# Altium PCB V1.PcbDoc
Units mil, origin at the board's own origin, x right, y up, seen from the top; angles counter-clockwise.
Board outline 6000 x 4000 mil, 2 copper layers (Top Layer, Bottom Layer); 35 components, 13 nets, 112 pads, 15 vias.
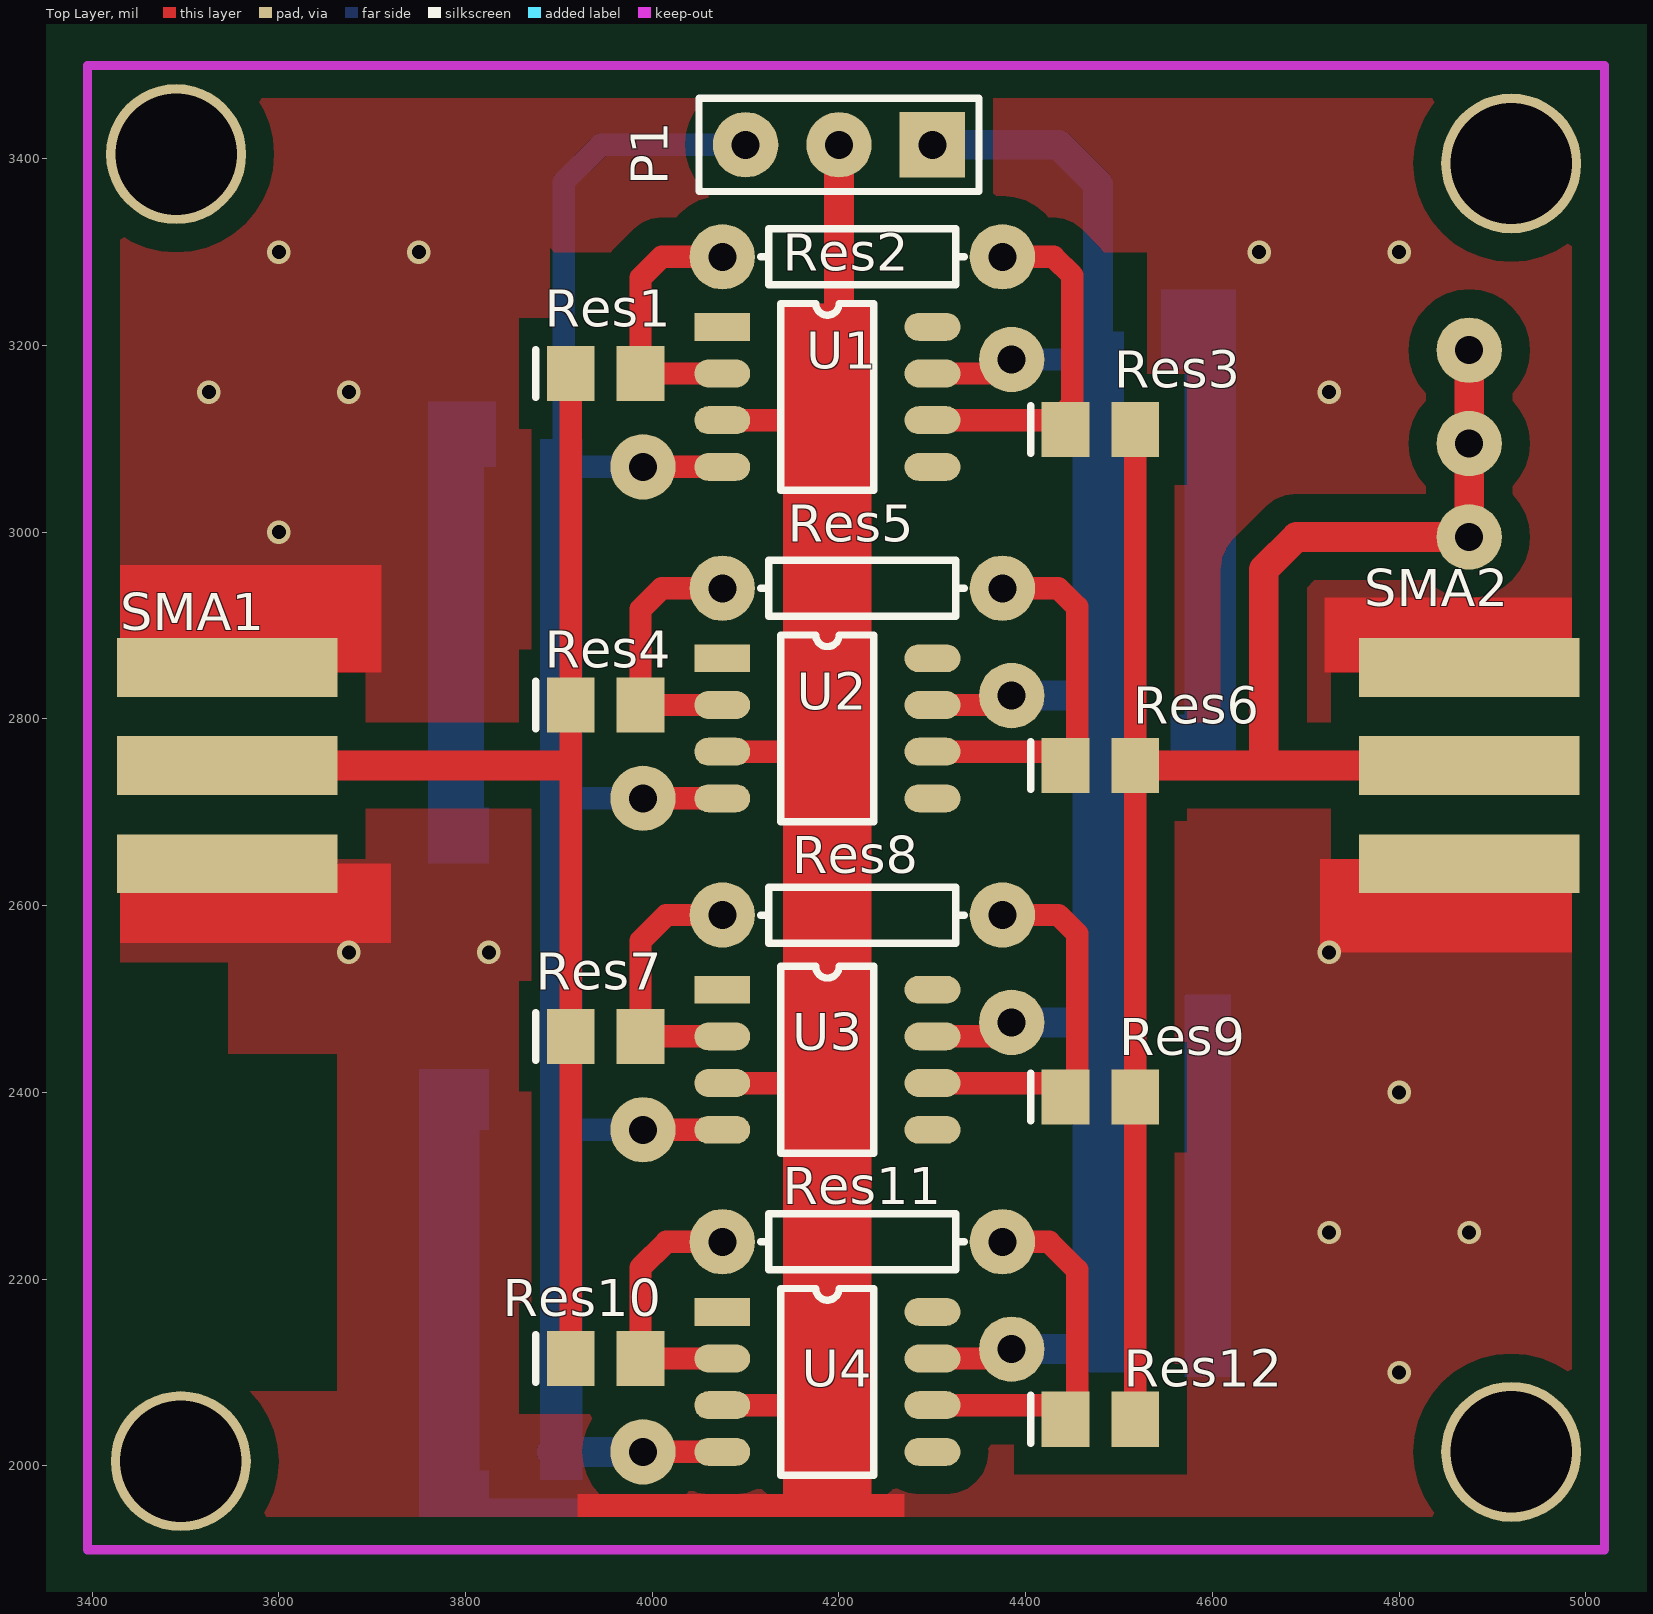
[diagram p0: Top Layer view]
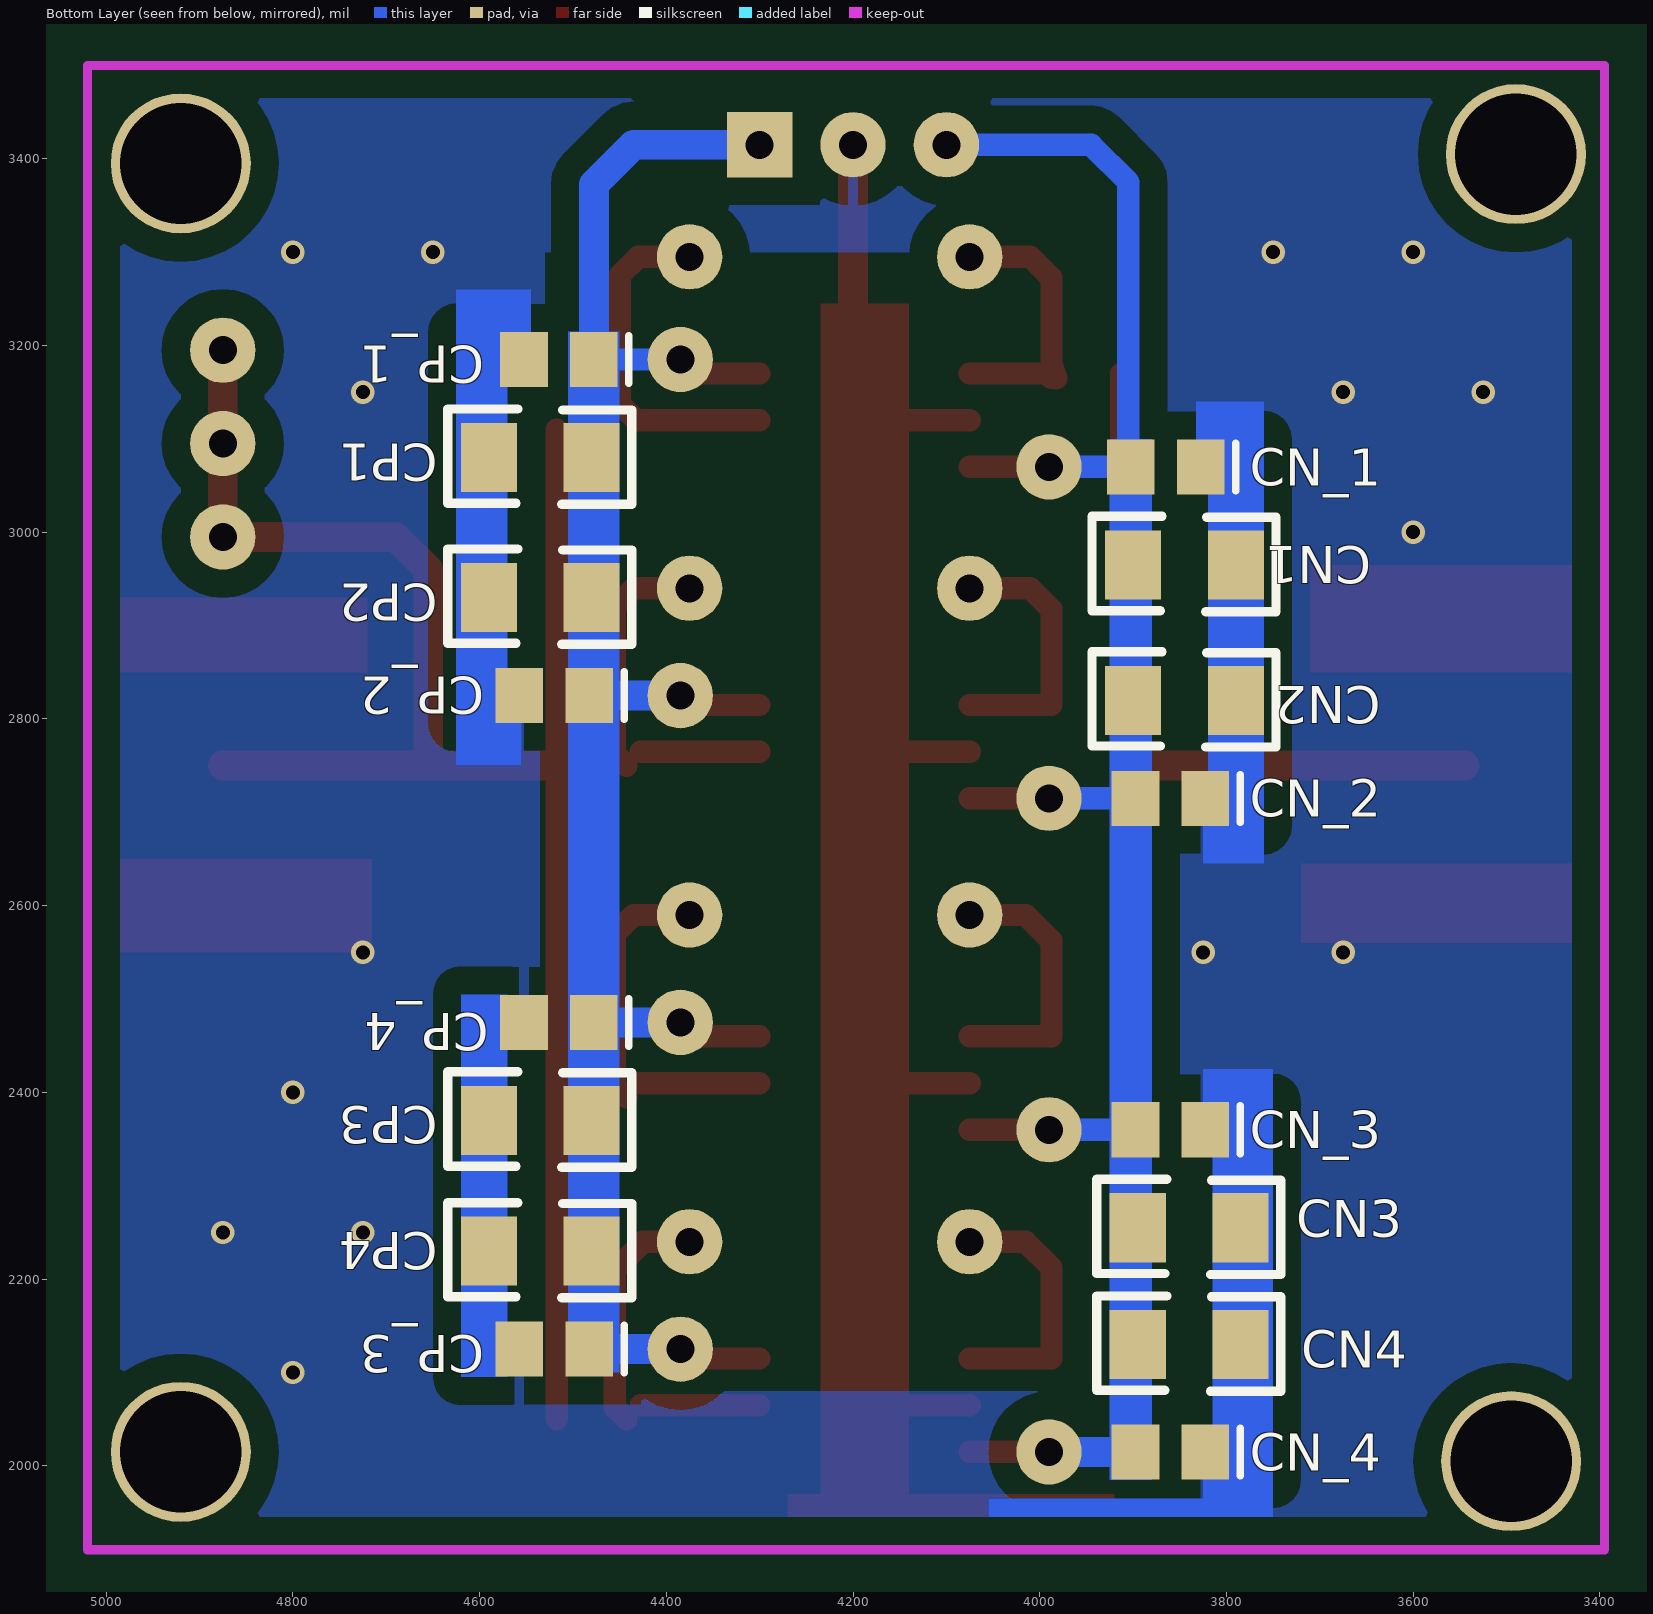
[diagram p1: Bottom Layer view, seen from below]

## Layer stack, top to bottom
Top Solder: solder mask 0.4, Solder Resist, Dk 3.5
Top Layer: signal copper 1.4
Dielectric1: dielectric 12.6, FR-4, Dk 4.8
Bottom Layer: signal copper 1.4
Bottom Solder: solder mask 0.4, Solder Resist, Dk 3.5

## Board outline
1000,1000 7000,1000 7000,5000 1000,5000

## Design rules (kind name [scope] priority, off if disabled: settings)
Clearance [All] p1: gap=10 ignorepadtopadclearanceinfootprint=FALSE except(0: Arc-Hole Track-Hole SMDPad-Hole THPad-Hole Via-Hole Fill-Hole Poly-Hole Region-Hole Text-Hole)
FabricationTestPointUsage TestPointUsage [All] p1: valid=0 allowmultiple=FALSE
FabricationTestpoint Testpoint [All] p1: side=3 testpointundercomponent=TRUE minsize=40 maxsize=100 preferedsize=60 minholesize=0 maxholesize=40 preferedholesize=32 testpointgrid=1 allowsidetop=TRUE allowsidebottom=TRUE usegrid=TRUE gridtolerance=0.01
HoleSize [All] p1: absolutevalues=TRUE maxlimit=1000 minlimit=1 maxpercent=80.000 minpercent=20.000
HoleToHoleClearance [All] p1: gap=0 allowstackedmicrovias=TRUE
MinimumSolderMaskSliver [All] p1: minsoldermaskwidth=0
PolygonConnect [All] p1: connectstyle=Relief reliefconductorwidth=10 reliefentries=4 polygonreliefangle="90 Angle" airgapwidth=10
RoutingVias [All] p1: holewidth=28 width=50 viastyle="Through Hole" minholewidth=28 minwidth=50 maxholewidth=28 maxwidth=50
SilkToSilkClearance [All] p1: silktosilkclearance=0
SilkToSolderMaskClearance SilkscreenOverComponentPads [IsPad] p1: minsilkscreentomaskgap=0 clearancetoexposedcopper=TRUE
SolderMaskExpansion [All] p1: expansion=4
Width [All] p1: maxlimit=100 minlimit=10 preferedwidth=10
23 further rules are at their usual default settings.

## Components (designator, comment, footprint, x,y, rotation, side; value= is the part's Value field where it differs from the comment)
CN1 "Cap Pol1" CAP_BTAN 3790,2965 r0 bottom
CN2 "Cap Pol1" CAP_BTAN 3790,2820 r0 bottom
CN3 "Cap Pol1" CAP_BTAN 3785,2255 r0 bottom
CN4 "Cap Pol1" CAP_BTAN 3785,2130 r0 bottom
CN_1 "cap" C0805 3865,3070 r0 bottom
CN_2 "cap" C0805 3860,2715 r0 bottom
CN_3 "cap" C0805 3860,2360 r0 bottom
CN_4 "cap" C0805 3860,2015 r0 bottom
CP1 "Cap Pol1" CAP_BTAN 4480,3080 r0 bottom
CP2 "Cap Pol1" CAP_BTAN 4480,2930 r0 bottom
CP3 "Cap Pol1" CAP_BTAN 4480,2370 r0 bottom
CP4 "Cap Pol1" CAP_BTAN 4480,2230 r0 bottom
CP_1 "cap" C0805 4515,3185 r0 bottom
CP_2 "cap" C0805 4520,2825 r0 bottom
CP_3 "cap" C0805 4520,2125 r0 bottom
CP_4 "cap" C0805 4515,2475 r0 bottom
P1 "Header 3" HDR1X3 4300,3415 r180 top
Res1 "Res" C0805 3950,3170 r0 top
Res2 "Res" R-AXIAL0.3 4075,3295 r0 top
Res3 "Res" C0805 4480,3110 r0 top
Res4 "Res" C0805 3950,2815 r0 top
Res5 "Res" R-AXIAL0.3 4075,2940 r0 top
Res6 "Res" C0805 4480,2750 r0 top
Res7 "Res" C0805 3950,2460 r0 top
Res8 "Res" R-AXIAL0.3 4075,2590 r0 top
Res9 "Res" C0805 4480,2395 r0 top
Res10 "Res" C0805 3950,2115 r0 top
Res11 "Res" R-AXIAL0.3 4075,2240 r0 top
Res12 "Res" C0805 4480,2050 r0 top
SMA1 "SMA-xie" sma-xie 3445,2835 r0 top
SMA2 "SMA-xie" sma-xie 4775,2835 r0 top
U1 "THS3091" SOIC-8D 4075,3220 r0 top
U2 "THS3091" SOIC-8D 4075,2865 r0 top
U3 "THS3091" SOIC-8D 4075,2510 r0 top
U4 "THS3091" SOIC-8D 4075,2165 r0 top

## Footprints (in the part's own frame and the unit in brackets; to place one, negate y for a bottom-side part, rotate by r counter-clockwise, add the part's x,y. Pads: shape width x height; smd on the part's side, far side on the other; paste and mask are expansions set on the pad)
C0805 [mm] "Chip Capacitor; Body 2.0 x 1.2 mm (LxW typ)"
  rect 1.3x1.5 smd: 1(-0.95,0) 2(0.95,0)
  silkscreen extent -1.9,-0.65 -1.9,0.65
CAP_BTAN [mil]
  rect 60x74 smd: 1(0,0) 2(110,0)
  silkscreen extent -43,-52 154,50
HDR1X3 [mil] "Connector; Header; 3 Position"
  rect 70x70 hole 30: 1(0,0)
  round 70 hole 30: 2(100,0) 3(200,0)
  silkscreen extent -50,-50 250,50
R-AXIAL0.3 [mil]
  round 70 hole 30: 1(0,0) 2(300,0)
  silkscreen extent 41,-30 259,30
sma-xie [mm] "SMA接头外螺内孔，斜四角"
  rect 6x1.6 smd: 1(2.54,0.508) 2(2.54,-2.159) 3(2.54,-4.826)
SOIC-8D [mm] "封"
  rect 1.52x0.76 smd: 1(0,0)
  oval 1.52x0.76 smd: 2(0,-1.27) 3(0,-2.54) 4(0,-3.81) 5(5.72,-3.81) 6(5.72,-2.54) 7(5.72,-1.27) 8(5.72,0)
  silkscreen extent 1.59,-4.44 4.13,0.64

## Part data
CN1 CN2 CN3 CN4 CP1 CP2 CP3 CP4: "Polarized Capacitor (Radial)"
CN_1 CN_2 CN_3 CN_4 CP_1 CP_2 CP_3 CP_4: "贴片电容"
P1: "Header, 3-Pin"
Res1 Res2 Res3 Res4 Res5 Res6 Res7 Res8 Res9 Res10 Res11 Res12: "适用于0805的贴片元件，包括磁珠"
SMA1 SMA2: "外螺内孔，斜角，或直四角斜着放置"
U1 U2 U3 U4: "单路高压低失真电流反馈 运放 ,通常申请DDA，即下方带有热焊盘的，有利于散热"

## Free pads (board coordinates)
  round 70 hole 30: 0(4385,3185) 1(4385,2825) 2(4385,2475) 3(4385,2125) 4(3990,3070) 5(3990,2715) 6(3990,2360) 7(3990,2015) 9(4875,2995) 10(4875,3095) 11(4875,3195)
  round 150 hole 130: 8(3490,3405) 8(3495,2005) 8(4920,2015) 8(4920,3395)

## Via types
v1: diameter 25, hole 15, Top Layer to Bottom Layer, tented both sides, 15 vias

## Nets (pads, with @x,y where several pads share a name; then routed paths per layer and width w, separated by ;. In a path a pad name is that pad's centre, name@x,y a point inside that pad or via, vN(x,y) a via of type N, cw(c..) or ccw(c..) an arc to the next point about the centre after c; other vN are vias at no path point)
GND: CN1.1 CN2.1 CN3.1 CN4.1 CN_1.1 CN_2.1 CN_3.1 CN_4.1 CP1.2 CP2.2 CP3.2 CP4.2 CP_1.2 CP_2.2 CP_3.2 CP_4.2 P1.2 SMA1.1 SMA1.3 SMA2.1 SMA2.3 U1.3 U2.3 U3.3 U4.3 | length 620
  Top Layer w24: U4.3 4165,2065 ; U3.3 4165,2410 ; U2.3 4185,2765 ; U1.3 4185,3120
  Top Layer w32: 4200,3195 P1.2
  other v1: 4800,2100 4725,2250 4875,2250 4800,2400 3675,2550 3825,2550 4725,2550 3600,3000 3525,3150 3675,3150 4725,3150 3600,3300 3750,3300 4650,3300 4800,3300
NetRes1_1: Res1.1 Res4.1 Res7.1 Res10.1 SMA1.2 | length 1410
  Top Layer w24: Res10.1 Res7.1 Res4.1 Res1.1
  Top Layer w32: SMA1.2 3900,2750
NetRes1_2: Res1.2 Res2.1 U1.2 | length 334.4
  Top Layer w24: Res1.2 U1.2 ; Res1.2@3987.66,3165.28 3982.4,3165 3984.27,3170.98 3987.4,3180.98 3987.4,3272.4 4010,3295 Res2.1 ; Res2.1@4060,3295 Res2.1 ; Res2.1@4061.42,3295 Res2.1 ; Res2.1@4070,3300 cw(c4070,3295) Res2.1
NetRes2_2: Res2.2 Res3.1 U1.6 | length 377.9
  Top Layer w24: U1.6 4432.6,3120 4450,3137.4 4450,3275 4430,3295 Res2.2
NetRes3_2: pad.9 pad.10 pad.11 Res3.2 Res6.2 Res9.2 Res12.2 SMA2.2 | length 2062.1
  Top Layer w24: Res12.2 Res9.2 Res6.2 Res3.2
  Top Layer w32: Res6.2 4655,2750 ; SMA2.2 4655,2750 ; pad.11 pad.10 pad.9 4690,2995 4655,2960 4655,2750
NetRes4_2: Res4.2 Res5.1 U2.2 | length 287
  Top Layer w24: U2.2 Res4.2 3987.4,2917.4 4010,2940 Res5.1
NetRes5_2: Res5.2 Res6.1 U2.6 | length 390.8
  Top Layer w24: U2.6 Res6.1@4427.6,2765 ; Res5.2 4435,2940 4455,2920 4455,2762.4 Res6.1
NetRes7_2: Res7.2 Res8.1 U3.2 | length 289
  Top Layer w24: U3.2 Res7.2 3987.4,2562.4 4015,2590 Res8.1
NetRes8_2: Res8.2 Res9.1 U3.6 | length 395.8
  Top Layer w24: U3.6 Res9.1@4427.6,2410 ; Res8.2 4435,2590 4455,2570 4455,2407.4 Res9.1
NetRes10_2: Res10.2 Res11.1 U4.2 | length 284
  Top Layer w24: U4.2 Res10.2 3987.4,2212.4 4015,2240 Res11.1
NetRes11_2: Res11.2 Res12.1 U4.6 | length 385
  Top Layer w24: U4.6 Res12.1@4427.6,2065 ; Res11.2 4425,2240 4455,2210 4455,2062.4 Res12.1
VCC: CP1.1 CP2.1 CP3.1 CP4.1 CP_1.1 CP_2.1 CP_3.1 CP_4.1 P1.1 pad.0 pad.1 pad.2 pad.3 U1.7 U2.7 U3.7 U4.7 | length 1104.7
  Top Layer w24: U4.7 4375,2115 pad.3 ; U3.7 pad.2@4370,2460 ; U2.7 4375,2815 pad.1 ; U1.7 4360,3170 pad.0
  Bottom Layer w24: pad.0 CP_1.1
  Bottom Layer w32: P1.1 4435,3415 4477.6,3372.4 CP_1.1 ; pad.3 CP_3.1 ; pad.2 CP_4.1@4482.6,2475 ; pad.1 CP_2.1
VSS: CN1.2 CN2.2 CN3.2 CN4.2 CN_1.2 CN_2.2 CN_3.2 CN_4.2 P1.3 pad.4 pad.5 pad.6 pad.7 U1.4 U2.4 U3.4 U4.4 | length 1215.4
  Top Layer w24: pad.7 U4.4 ; pad.6 U3.4 ; pad.5 U2.4 ; pad.4 U1.4
  Bottom Layer w24: CN_3.2 pad.6 ; CN_2.2 pad.5 ; CN_1.2 3905,3072.6 3905,3375 3945,3415 P1.3 ; CN_1.2@3915,3070 pad.4
  Bottom Layer w32: CN_4.2@3892.4,2015 pad.7
pads on no net: U1.1 U1.5 U1.8 U2.1 U2.5 U2.8 U3.1 U3.5 U3.8 U4.1 U4.5 U4.8

## Polygon pours and split planes (outlines as drawn)
GND on Top Layer "Top Layer-No Net" (solid, remove dead copper, pour order 1000): 3395,3500 3395,1910 5020,1910 5020,3500 3395,3500
GND on Bottom Layer "Top Layer-No Net" (solid, remove dead copper, pour order 1001): 3395,3500 3395,1910 5020,1910 5020,3500 3395,3500

## Keep-outs
Keep-Out Layer:
  lines w10: 3395,1910 3395,3500 5020,3500 5020,1910 3395,1910

## Other copper
Top Layer:
  rectangle net GND: 4140,1995 4235,3245
  rectangle net GND: 3920,1945 4270,1970
  rectangle net GND: 4140,1955 4235,2005
  rectangle net GND: 4720,2850 4985,2930
  rectangle net GND: 4715,2550 4985,2650
  rectangle net GND: 3430,2560 3720,2645
  rectangle net GND: 3430,2850 3710,2965
  pour cut-out: 3890,3305 3890,2080 4517.4,2080 4530,2092.6 4530,3300 3895,3300
Bottom Layer:
  rectangle net VCC: 4450,2100 4505,3215
  rectangle net GND: 4570,2795 4625,3215
  rectangle net GND: 4570,2095 4620,2505
  rectangle net VSS: 3880,1985 3925,3100
  rectangle net GND: 3750,1985 3815,2390
  rectangle net GND: 3760,2685 3820,3100
  rectangle net GND: 3750,1945 3825,1995
  rectangle net GND: 3820,1945 4055,1965
  rectangle net GND: 3750,2360 3825,2425
  rectangle net GND: 3760,2645 3825,2705
  rectangle net GND: 3760,3069.99 3832.6,3140
  rectangle net GND: 4555,2750 4625,2805
  rectangle net GND: 4545,3175 4625,3260
  pour cut-out: 3890,3300 3890,2080 4530,2080 4530,3300